# Altium PCB AudioBoard.PcbDoc
Units mil, origin at the board's own origin, x right, y up, seen from the top; angles counter-clockwise.
Board outline 2950 x 900 mil, 2 copper layers (Top Layer, Bottom Layer); 32 components, 20 nets, 105 pads, 0 vias.
Unrouted connection lines stored in the file: 62.
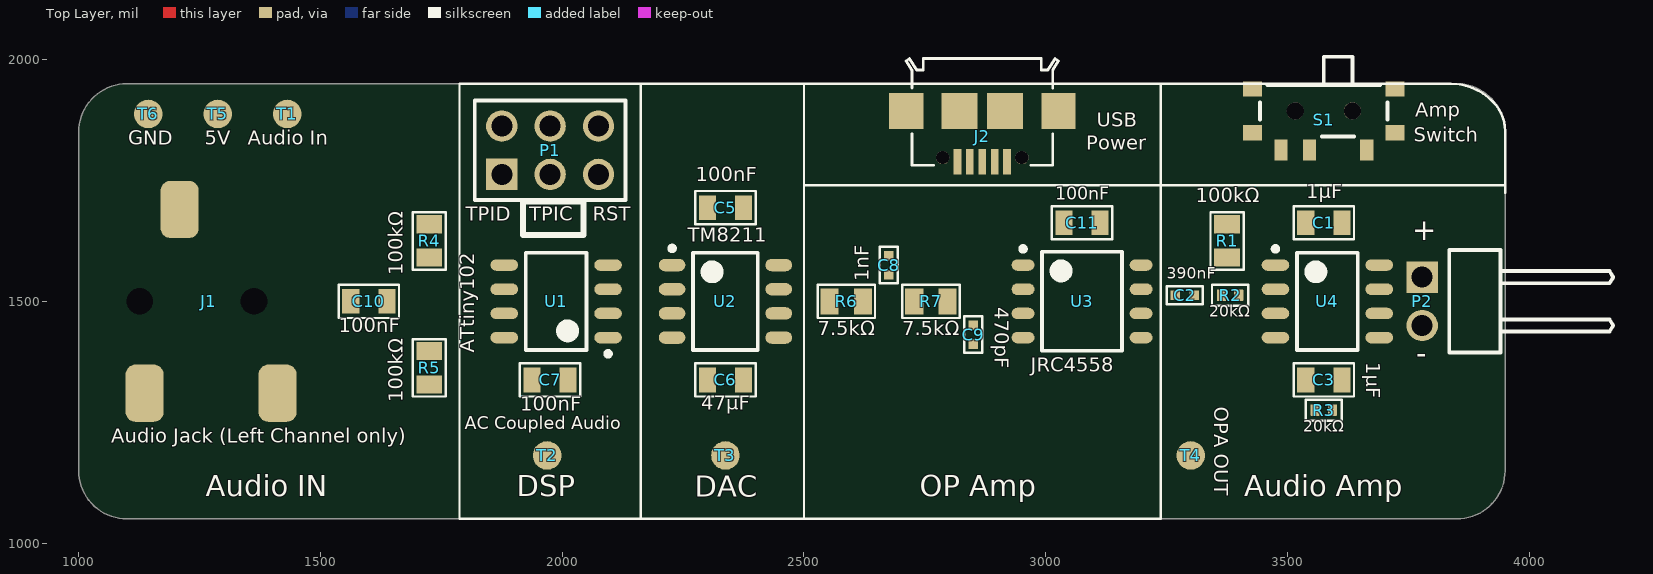
[diagram p0: Top Layer view]
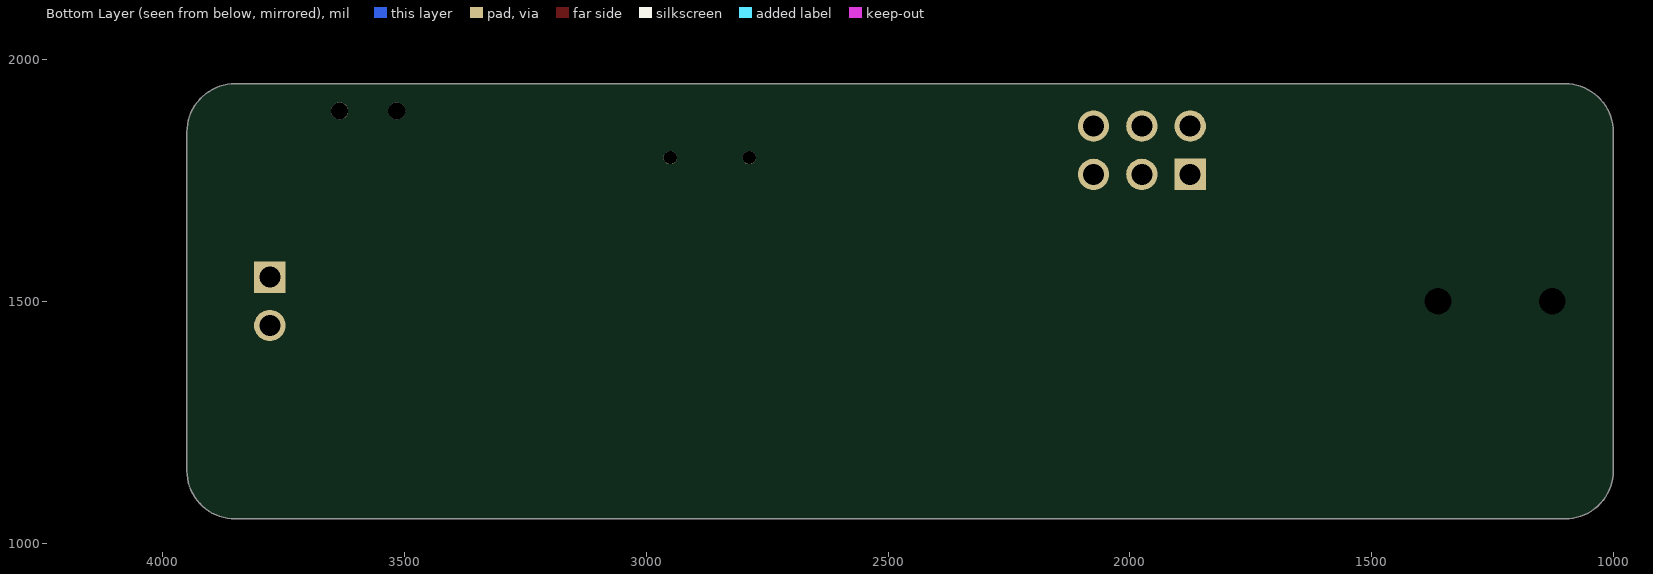
[diagram p1: Bottom Layer view, seen from below]

## Layer stack, top to bottom
Top Solder: solder mask 0.4, Solder Resist, Dk 3.5
Top Layer: signal copper 1.4
Dielectric 1: dielectric 12.6, FR-4, Dk 4.8
Bottom Layer: signal copper 1.4
Bottom Solder: solder mask 0.4, Solder Resist, Dk 3.5

## Board outline
1100,1950 ccw(c1100,1850) 1000,1850 1000,1150 ccw(c1100,1150) 1100,1050 3850,1050 ccw(c3850,1150) 3950,1150 3950,1850 ccw(c3850,1850) 3850,1950

## Design rules (kind name [scope] priority, off if disabled: settings)
Clearance [All] p1: gap=10 ignorepadtopadclearanceinfootprint=FALSE except(0: Arc-Hole Track-Hole SMDPad-Hole THPad-Hole Via-Hole Fill-Hole Poly-Hole Region-Hole Text-Hole)
PolygonConnect [All] p1: connectstyle=Relief reliefconductorwidth=10 reliefentries=4 polygonreliefangle="90 Angle" airgapwidth=10
RoutingVias [All] p1: holewidth=28 width=50 viastyle="Through Hole" minholewidth=28 minwidth=50 maxholewidth=28 maxwidth=50
SolderMaskExpansion [All] p1: expansion=4 istentingtop=FALSE
Width [All] p1: maxlimit=25 minlimit=10 preferedwidth=10
30 further rules are at their usual default settings.

## Components (designator, comment, footprint, x,y, rotation, side; value= is the part's Value field where it differs from the comment)
C1 "1uF" WCAP-CSGP_0805_H=1.25mm 3575,1662.5 r180 top
C2 "390nF" WCAP-CSGP_0402 3287.5,1512.5 r180 top
C3 "1uF" WCAP-CSGP_0805_H=1.25mm 3575,1337.5 r180 top
C5 "100nF" WCAP-CSGP_0805_H=1.25mm 2337.5,1693.75 r180 top
C6 "47uF" WCAP-CSGP_0805_H=1.25mm 2337.5,1337.5 r180 top
C7 "100nF" WCAP-CSGP_0805_H=1.25mm 1974.9,1337.5 r180 top
C8 "1nF" WCAP-CSGP_0402 2675,1575 r90 top
C9 "470pF" WCAP-CSGP_0402 2850,1431.25 r90 top
C10 "100nF" WCAP-CSGP_0805_H=1.25mm 1600,1500 r0 top
C11 "100nF" WCAP-CSGP_0805_H=1.25mm 3075,1662.5 r180 top
J1 "PJ-320B Audio Jack" "PJ-320B Audio Jack" 1206.28,1415 r270 top
J2 "Micro USB 2.0 Type B Receptacle" 629105136821 2868.75,1893.75 r180 top
P1 "61300621121" 61300621121 1975,1812.5 r0 top
P2 "61300211021" 61300211021 3887.5,1500 r90 top
R1 "100k" WRIS-PSMB_0805_H=0.22mm 3375,1625 r90 top
R2 "20k" "0402 Resistor" 3381.25,1512.5 r0 top
R3 "20k" "0402 Resistor" 3575,1275 r0 top
R4 "100k" WRIS-PSMB_0805_H=0.22mm 1725,1625 r270 top
R5 "100k" WRIS-PSMB_0805_H=0.22mm 1725,1362.5 r270 top
R6 "7.5k" WRIS-PSMB_0805_H=0.22mm 2587.5,1500 r0 top
R7 "7.5k" WRIS-PSMB_0805_H=0.22mm 2762.5,1500 r0 top
S1 "450404015514" 450404015514 3575,1893.75 r0 top
T1 "AUDIO JACK OUT" Testpoint 1431.25,1887.5 r0 top
T2 "AUDIO IN" Testpoint 1968.75,1181.25 r0 top
T3 "DAC OUT" Testpoint 2337.5,1181.25 r0 top
T4 "OPA OUT" Testpoint 3300,1181.25 r0 top
T5 "VCC" Testpoint 1287.5,1887.5 r0 top
T6 "GND" Testpoint 1143.75,1887.5 r0 top
U1 "ATtiny102" ATtiny102 1987.5,1500 r180 top
U2 "TM8211" TM8211 2337.5,1500 r0 top
U3 "JRC4558" JRC4558 3075,1500 r0 top
U4 "NS8002" NS8002 3582.28,1500 r0 top

## Footprints (in the part's own frame and the unit in brackets; to place one, negate y for a bottom-side part, rotate by r counter-clockwise, add the part's x,y. Pads: shape width x height; smd on the part's side, far side on the other; paste and mask are expansions set on the pad)
"0402 Resistor" [mm]
  rrect20% 0.49x0.6 smd: 1(-0.455,0) 2(0.455,0)
  body extent -0.5,-0.25 0.5,0.25, height 0.25
61300211021 [mm] "Pin Header, pitch 2.54 mm, THT, Angled, single row, 2p"
  rect 1.65x1.65 hole 1.1: 1(1.27,2.77)
  round 1.65 hole 1.1: 2(-1.27,2.77)
  silkscreen extent -2.69,-7.27 2.69,1.35, body extent -2.54,-7.27 2.54,3.09, height 2.58
61300621121 [mm] "Pin Header, pitch 2.54 mm, THT, Vertical, dual row, 6p"
  rect 1.65x1.65 hole 1.1: 1(-2.54,-1.27)
  round 1.65 hole 1.1: 2(-2.54,1.27) 3(0,-1.27) 4(0,1.27) 5(2.54,-1.27) 6(2.54,1.27)
  silkscreen extent -3.96,-2.62 3.96,2.62, body extent -3.81,-2.54 3.81,2.54, height 8.59
450404015514 [mm] "Right angle Slide Switch"
  rect 0.7x1.1 smd: 1(2.25,-2.05) 2(-0.75,-2.05) 3(-2.25,-2.05)
  round 0.9 hole 0.9 unplated: M1(-1.5,0) M2(1.5,0)
  rect 1x0.8 smd: M3(-3.75,1.15) M4(3.75,1.15) M5(-3.75,-1.15) M6(3.75,-1.15)
  silkscreen extent -3.35,-1.35 3.35,2.85, body extent -3.85,-2.25 3.85,2.88, height 1.4
629105136821 [mm] "Micro USB 2.0 SMT Type B Horizontal 5 Contacts"
  rect 0.4x1.35 smd: 1(-1.3,2.675) 2(-0.65,2.675) 3(0,2.675) 4(0.65,2.675) 5(1.3,2.675)
  round 0.7 hole 0.7 unplated: MH1(-2.075,2.45) MH2(2.075,2.45)
  rect 1.8x1.9 smd: Shell(-4,0) Shell(4,0)
  rect 1.9x1.9 smd: Shell(-1.2,0) Shell(1.2,0)
  silkscreen extent -4,-2.75 4,2.85, body extent -4,-2.73 4,3.17, height 2.69
ATtiny102 [mm] "SOIC, 8-Leads, Body 4,93x3,90mm, Pitch 1,27mm, IPC Medium Density"
  oval 1.45x0.6 smd: 1(-2.725,1.905) 2(-2.725,0.635) 3(-2.725,-0.635) 4(-2.725,-1.905) 5(2.725,-1.905) 6(2.725,-0.635) 7(2.725,0.635) 8(2.725,1.905)
  silkscreen extent -2.85,-2.55 1.6,2.88, body extent -3,-2.55 3,2.55, height 1.75
JRC4558 [mm] "SOIC, 8-Leads, Body 5,20x4,50mm, Pitch 1,27mm, IPC Medium Density"
  oval 1.2x0.6 smd: 1(-3.1,1.905) 2(-3.1,0.635) 3(-3.1,-0.635) 4(-3.1,-1.905) 5(3.1,-1.905) 6(3.1,-0.635) 7(3.1,0.635) 8(3.1,1.905)
  silkscreen extent -3.22,-2.6 2.1,2.88, body extent -3.25,-2.6 3.25,2.6, height 1.9
NS8002 [mm] "Class AB 1.8W x 1 @ 4O 3V ~ 5.25V SOP-8_EP_150mil Audio Power OpAmps RoHSm, IPC Medium Density"
  oval 1.45x0.6 smd: 1(-2.725,1.905) 2(-2.725,0.635) 3(-2.725,-0.635) 4(-2.725,-1.905) 5(2.725,-1.905) 6(2.725,-0.635) 7(2.725,0.635) 8(2.725,1.905)
  silkscreen extent -2.85,-2.55 1.6,2.88, body extent -3,-2.55 3,2.55, height 1.7
"PJ-320B Audio Jack" [mil]
  rrect50% 118.11x78.74 smd: 1(105,-70) 2(-275,2.5) 3(105,205)
  round 0 hole 55.12: 4(-85,156.22) 5(-85,-80)
  body extent -303,-278 131,274, height 197
Testpoint [mm]
  round 1.5 / inner round 1.5 / far side round 0 all layers, no hole: 1(0,0)
TM8211 [mm] "16-Bit SOP-8_150mil Digital To Analog Converter (DAC)"
  oval 1.4x0.65 smd: 1(-2.8,1.905) 2(-2.8,0.635) 3(-2.8,-0.635) 4(-2.8,-1.905) 5(2.8,-1.905) 6(2.8,-0.635) 7(2.8,0.635) 8(2.8,1.905)
  silkscreen extent -2.92,-2.55 1.7,2.9, body extent -3,-2.55 3,2.55, height 1.7
WCAP-CSGP_0402 [mm] "Ceramic Capacitors, body 1x0.5mm"
  rect 0.5x0.5 smd: 1(-0.5,0) 2(0.5,0)
  body extent -0.5,-0.25 0.5,0.25, height 0.5
WCAP-CSGP_0805_H=1.25mm [mm] "Ceramic Capacitors, body 2x1.25mm"
  rect 0.9x1.3 smd: 1(-0.95,0) 2(0.95,0)
  body extent -1,-0.62 1,0.63, height 1.25
WRIS-PSMB_0805_H=0.22mm [mm] "Metal Plate Resistor, SMT, body size 2x1.25mm"
  rect 0.95x1.36 smd: 1(-0.875,0) 2(0.875,0)
  body extent -1,-0.62 1,0.63, height 0.22

## Part data
C1 C3: library part 885012207022, "WCAP-CSGP General Purpose Ceramic Capacitors, size 0805, 1uF, +/-10%, 10VDC", Capacitance Tolerance=+/-10%, Isolation Resistance=>=0.5GOhm, Operating Temperature="-55 to +125degC", Rated Voltage=10VDC, Capacitance=1uF, Ceramic Type=X7R, ComponentLink1Description=Manufacturer, ComponentLink1URL=http://www.we-online.de, ComponentLink2Description=Datasheet, ComponentLink2URL=https://katalog.we-online.com/pbs/datasheet/885012207022.pdf, Dissipation Factor=#NAME?, Height="1.25mm +/-0.10mm", Mounting Technology=SMD, Packaging="Tape and Reel", Part Number=885012207022, Published Date="August 2019", Publisher="Wurth Elektronik", Size=0805, Technical Reference=X7R0805105K010DFCT10000
C2 C9: library part 885012205025, "WCAP-CSGP General Purpose Ceramic Capacitors, size 0402, 1nF, +/-10%, 16VDC", Capacitance=1nF, Capacitance Tolerance=+/-10%, Isolation Resistance=>=10GOhm, Operating Temperature="-55 to +125degC", Rated Voltage=16VDC, Ceramic Type=X7R, ComponentLink1Description=Manufacturer, ComponentLink1URL=http://www.we-online.de, ComponentLink2Description=Datasheet, ComponentLink2URL=https://katalog.we-online.com/pbs/datasheet/885012205025.pdf, Dissipation Factor=#NAME?, Height="0.5mm +/-0.05mm", Mounting Technology=SMD, Packaging="Tape and Reel", Part Number=885012205025, Published Date="August 2019", Publisher="Wurth Elektronik", Size=0402, Technical Reference=X7R0402102K016DFCT10000
C5 C6 C7 C10 C11: library part 885012207022, "WCAP-CSGP General Purpose Ceramic Capacitors, size 0805, 1uF, +/-10%, 10VDC", Capacitance=1uF, Capacitance Tolerance=+/-10%, Isolation Resistance=>=0.5GOhm, Operating Temperature="-55 to +125degC", Rated Voltage=10VDC, Ceramic Type=X7R, ComponentLink1Description=Manufacturer, ComponentLink1URL=http://www.we-online.de, ComponentLink2Description=Datasheet, ComponentLink2URL=https://katalog.we-online.com/pbs/datasheet/885012207022.pdf, Dissipation Factor=#NAME?, Height="1.25mm +/-0.10mm", Mounting Technology=SMD, Packaging="Tape and Reel", Part Number=885012207022, Published Date="August 2019", Publisher="Wurth Elektronik", Size=0805, Technical Reference=X7R0805105K010DFCT10000
C8: library part 885012205025, "WCAP-CSGP General Purpose Ceramic Capacitors, size 0402, 1nF, +/-10%, 16VDC", Capacitance Tolerance=+/-10%, Isolation Resistance=>=10GOhm, Operating Temperature="-55 to +125degC", Rated Voltage=16VDC, Capacitance=1nF, Ceramic Type=X7R, ComponentLink1Description=Manufacturer, ComponentLink1URL=http://www.we-online.de, ComponentLink2Description=Datasheet, ComponentLink2URL=https://katalog.we-online.com/pbs/datasheet/885012205025.pdf, Dissipation Factor=#NAME?, Height="0.5mm +/-0.05mm", Mounting Technology=SMD, Packaging="Tape and Reel", Part Number=885012205025, Published Date="August 2019", Publisher="Wurth Elektronik", Size=0402, Technical Reference=X7R0402102K016DFCT10000
J2: library part 629105136821, "Micro USB 2.0 Type B, Receptacle, Horizontal, SMT", Manufacturer="Wurth Elektronik", Operating Temperature="-40 to +105degC", Rated Current=1A, Working Voltage=30VAC, Application="Micro USB 2.0", ComponentLink1Description=Manufacturer, ComponentLink1URL=http://www.we-online.de, ComponentLink2Description=Datasheet, ComponentLink2URL=https://katalog.we-online.com/em/datasheet/629105136821.pdf, Gender=Receptacle, Interface Type="Type B", Manufacturer Part Number=629105136821, Mounting Technology=SMT, Packaging="Tape and Reel", Pin Number=5, Published Date="August 2020", Type=Horizontal
P1: "WR-PHD Pin Header, THT, pitch 2.54mm, Dual Row, Vertical, 6p", Contact Resistance=20mOhm, Manufacturer="Wurth Elektronik", Operating Temperature="-40 to +105degC", Rated Current=3A, Withstanding Voltage=500VAC, Working Voltage=250VAC, ComponentLink1Description=Manufacturer, ComponentLink1URL=http://www.we-online.de, ComponentLink2Description=Datasheet, ComponentLink2URL=https://www.we-online.com/catalog/datasheet/61300621121.pdf, Gender="Pin Header", Manufacturer Part Number=61300621121, Mounting Technology=THT, Orientation=Vertical, Packaging=Bag, Pin Number=6, Pitch=2.54mm, Published Date="May 2020", Row Number=Dual
P2: "WR-PHD Pin Header, THT, pitch 2.54mm, Single Row, Angled, 2p", Contact Resistance=20mOhm, Manufacturer="Wurth Elektronik", Operating Temperature="-40 to +105degC", Rated Current=3A, Withstanding Voltage=500VAC, Working Voltage=250VAC, ComponentLink1Description=Manufacturer, ComponentLink1URL=http://www.we-online.de, ComponentLink2Description=Datasheet, ComponentLink2URL=https://www.we-online.com/catalog/datasheet/61300211021.pdf, Gender="Pin Header", Manufacturer Part Number=61300211021, Mounting Technology=THT, Orientation=Angled, Packaging=Bag, Pin Number=2, Pitch=2.54mm, Published Date="May 2020", Row Number=Single
R1 R4 R5 R6 R7: library part 580060720008, "WRIS-PSMB Metal Plate Resistors, size 0805, 10mOhm, +/-1%, 0.5W", Operating Temperature="-55 to +155degC", Rated Current=7.07A, Rated Power=0.5W, Resistance=10mOhm, Resistance Tolerance=+/-1%, Temperature Coefficient of Resistance=+/-100ppm/degC, ComponentLink1Description=Manufacturer, ComponentLink1URL=http://www.we-online.de, ComponentLink2Description=Datasheet, ComponentLink2URL=https://katalog.we-online.com/pbs/datasheet/580060720008.pdf, Height=0.22mm, Length=2mm, Mounting Technology=SMT, Packaging="Tape and Reel", Part Number=580060720008, Published Date="September 2019", Publisher="Wurth Elektronik", Size=0805, Technical Reference=MB0805R010F102KAATP0000, Width=1.25mm
R2 R3: library part Resistor, "CRG0402 1% 2K0", Package=None, Availability=Unavailable, MF="{'manufacturer': u'TE Connectivity'}", MP=4-1676480-2, Price=None
S1: "WS-SLSU Mini SMT Slide Switch, Same Side Connection, Right Angled, SPDT", Operating Temperature="-40 to +85degC", Rated Current=300mA, Rated Voltage=5VDC, Circuit=SPDT, ComponentLink1Description=Manufacturer, ComponentLink1URL=http://www.we-online.de, ComponentLink2Description=Datasheet, ComponentLink2URL=https://katalog.we-online.com/em/datasheet/450404015514.pdf, Contact Material="Copper Alloy", Contact Plating=Silver, Mounting Technology=SMT, Packaging="Tape and Reel", Part Number=450404015514, Published Date="September 2019", Publisher="Wurth Elektronik", Size=6.7x2.7mm, Switching Function=On-On, Terminal Material="Copper Alloy", Terminal Plating=Silver
T1 T2 T3 T4 T5 T6: library part Testpoint

## Nets (pads, with @x,y where several pads share a name; then routed paths per layer and width w, separated by ;. In a path a pad name is that pad's centre, name@x,y a point inside that pad or via, vN(x,y) a via of type N, cw(c..) or ccw(c..) an arc to the next point about the centre after c; other vN are vias at no path point)
5V: C3.1 C5.1 C6.1 C7.1 C11.1 J2.1 P1.2 R1.2 R4.1 T5.1 U1.1 U2.5 U3.8 U4.6
"Audio IN": C10.2 T2.1 U1.5
BCK: U1.6 U2.1
DIN: U1.7 U2.3
GND: C1.1 C3.2 C5.2 C6.2 C7.2 C9.1 C11.2 J1.1 J2.5 J2.Shell P1.6 R5.2 S1.3 T6.1 U1.8 U2.4 U3.4 U4.7
NetC1_2: C1.2 U4.2 U4.3
NetC2_1: C2.1 R2.1
NetC8_1: C8.1 R6.2 R7.1
NetC9_2: C9.2 R7.2 U3.3
NetC10_1: C10.1 J1.3 T1.1
NetR1_1: R1.1 S1.2 U4.1
NetR2_2: R2.2 R3.1 U4.4
NetR4_2: R4.2 R5.1
NetR6_1: R6.1 T3.1 U2.6
"OPA OUT": C2.2 C8.2 T4.1 U3.1 U3.2
RESET: P1.5 U1.4
"Speaker High": P2.1 R3.2 U4.5
"Speaker Low": P2.2 U4.8
TPICLK: P1.3
TPIDATA: P1.1 U2.2
pads on no net: J1.2 J1.4 J1.5 J2.2 J2.3 J2.4 J2.MH1 J2.MH2 P1.4 S1.1 S1.M1 S1.M2 S1.M3 S1.M4 S1.M5 S1.M6 U1.2 U1.3 U2.7 U2.8 U3.5 U3.6 U3.7

## Silkscreen, mask and mechanical layers (free items; w line width, h text height)
Top Overlay:
  lines w5: 2500,1740 3237.5,1740 3950,1740 ; 3950,1725 3950,1852.14 ccw(c3864.64,1852.14) 3925,1912.5 3922.86,1914.64 ccw(c3837.5,1829.29) 3837.5,1950 3825,1950 3237.5,1950 ; 2162.5,1050 2500,1050 ; 2162.5,1050 2162.5,1950 ; 2162.5,1050 1787.5,1050 1787.5,1950 2162.5,1950 ; 2162.5,1950 2500,1950 ; 2500,1050 3237.5,1050 3237.5,1500 3237.5,1950 ; 2500,1050 2500,1950 ; 2500,1050 2500,1950 ; 2500,1950 3237.5,1950 ; 1537.5,1465.62 1662.5,1465.62 1662.5,1534.38 1537.5,1534.38 1537.5,1465.62 ; 1690.62,1303.12 1690.62,1421.88 1759.38,1421.88 1759.38,1303.12 1690.62,1303.12 ; 1690.62,1565.62 1690.62,1684.38 1759.38,1684.38 1759.38,1565.62 1690.62,1565.62 ; 1912.5,1303.12 2037.5,1303.12 2037.5,1371.88 1912.5,1371.88 1912.5,1303.12 ; 2275,1303.12 2400,1303.12 2400,1371.88 2275,1371.88 2275,1303.12 ; 2275,1659.38 2400,1659.38 2400,1728.12 2275,1728.12 2275,1659.38 ; 2528.12,1465.62 2646.88,1465.62 2646.88,1534.38 2528.12,1534.38 2528.12,1465.62 ; 2656.25,1537.5 2693.75,1537.5 2693.75,1612.5 2656.25,1612.5 2656.25,1537.5 ; 2703.12,1465.62 2821.88,1465.62 2821.88,1534.38 2703.12,1534.38 2703.12,1465.62 ; 2831.25,1393.75 2868.75,1393.75 2868.75,1468.75 2831.25,1468.75 2831.25,1393.75 ; 3012.5,1628.12 3137.5,1628.12 3137.5,1696.88 3012.5,1696.88 3012.5,1628.12 ; 3250,1493.75 3325,1493.75 3325,1531.25 3250,1531.25 3250,1493.75 ; 3340.62,1565.62 3340.62,1684.38 3409.38,1684.38 3409.38,1565.62 3340.62,1565.62 ; 3343.75,1490.62 3418.75,1490.62 3418.75,1534.38 3343.75,1534.38 3343.75,1490.62 ; 3512.5,1303.12 3637.5,1303.12 3637.5,1371.88 3512.5,1371.88 3512.5,1303.12 ; 3512.5,1628.12 3637.5,1628.12 3637.5,1696.88 3512.5,1696.88 3512.5,1628.12 ; 3537.5,1253.12 3612.5,1253.12 3612.5,1296.88 3537.5,1296.88 3537.5,1253.12
  lines w12: 1918.75,1637.5 2043.75,1637.5 2043.75,1706.25 1918.75,1706.25 1918.75,1637.5
  text "Amp" at 3763.63,1871.31 h50
  text "USB" at 3105.5,1850.59 h50
  text "Switch" at 3761.49,1819.34 h50
  text "GND" at 1102.48,1813.09 h50
  text "5V" at 1261.15,1813.09 h50
  text "Audio In" at 1349.62,1813.02 h50
  text "Power" at 3083.37,1802.71 h50
  text "100nF" at 2275.68,1738.09 h50
  text "1µF" at 3538.83,1702.63 h50
  text "100nF" at 3019.42,1700.53 h45
  text "100kΩ" at 3310.16,1694.34 h50
  text "TPIC" at 1931.96,1656.81 h50
  text "RST" at 2063.6,1656.84 h50
  text "TPID" at 1800.67,1656.25 h50
  text "TM8211" at 2259.6,1613.09 h50
  text "+" at 3758.23,1611.83 h75
  text "100kΩ" at 1680.66,1553.91 h50 r90
  text "1nF" at 2643.75,1541.19 h50 r90
  text "390nF" at 3249.9,1537.97 h40
  text "470pF" at 2883.81,1488.17 h50 r270
  text "20kΩ" at 3338.45,1459.85 h40
  text "100nF" at 1538.18,1425.59 h50
  text "7.5kΩ" at 2528.08,1419.34 h50
  text "7.5kΩ" at 2703.08,1419.34 h50
  text "ATtiny102" at 1828.1,1393.75 h50 r90
  text "1µF" at 3652.63,1373.67 h50 r270
  text "-" at 3765.95,1355.96 h75
  text "JRC4558" at 2969.38,1344.34 h50
  text "100kΩ" at 1680.66,1291.41 h50 r90
  text "OPA OUT" at 3338.09,1281.72 h50 r270
  text "47µF" at 2287.53,1265.13 h50
  text "100nF" at 1913.18,1263.09 h50
  text "AC Coupled Audio" at 1798.17,1226.67 h45
  text "20kΩ" at 3532.2,1222.35 h40
  text "Audio Jack (Left Channel only)" at 1066.95,1196.9 h50
  text "Audio IN" at 1262.63,1082.03 h75
  text "DSP" at 1906.28,1082.13 h75
  text "OP Amp" at 2739.22,1081.96 h75
  text "Audio Amp" at 3410.05,1081.96 h75
  text "DAC" at 2273.91,1081.03 h75

## Text inside footprints (layer, text, board x,y; h text height)
J2: Mechanical 2 "PCB Edge" at 2915.99,1976.43 h16 r180